# EAGLE board KissCart64-8K-MCU-DirtyPCBs (EAGLE 6.6.0)
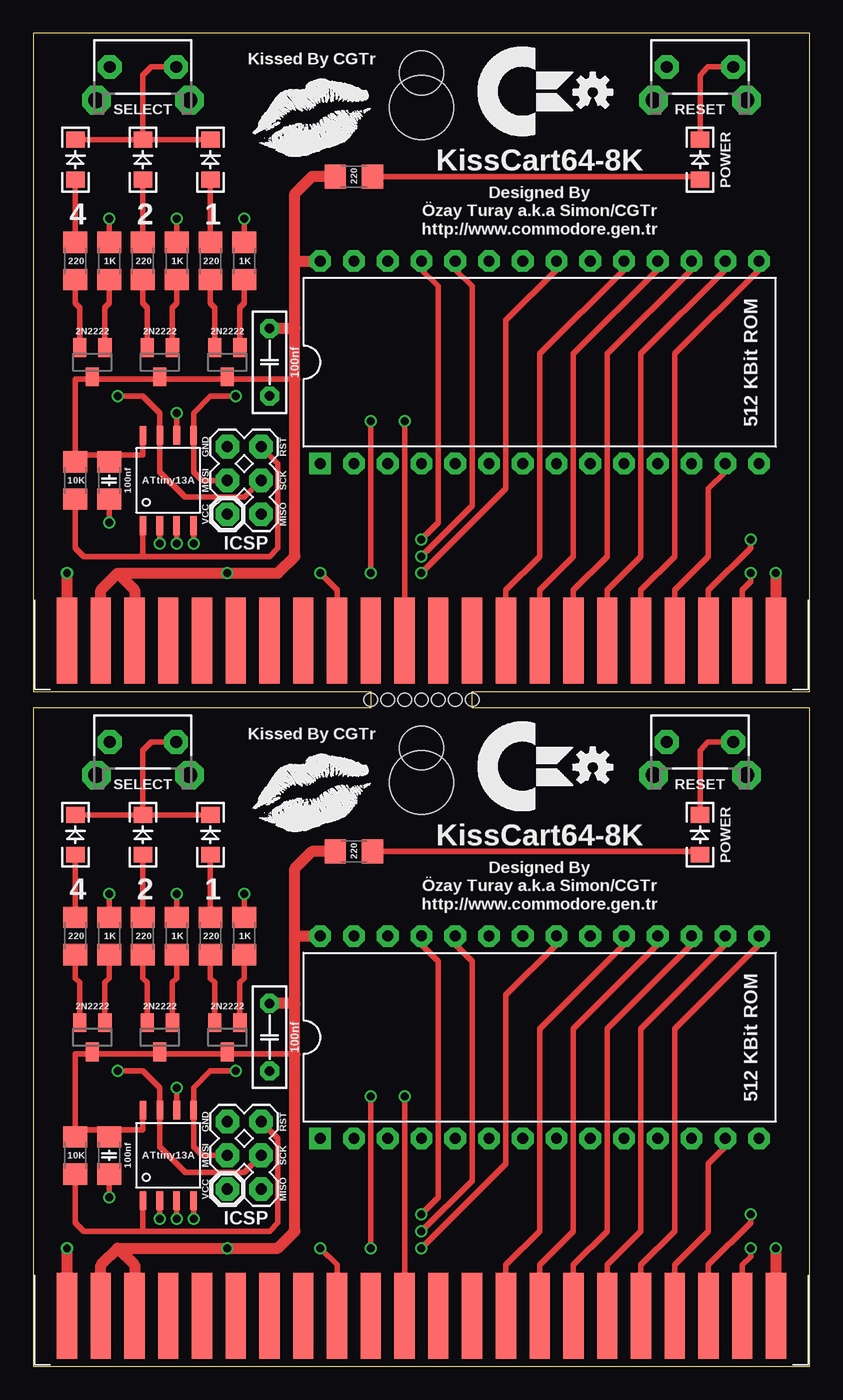
[diagram p0: board, top side]
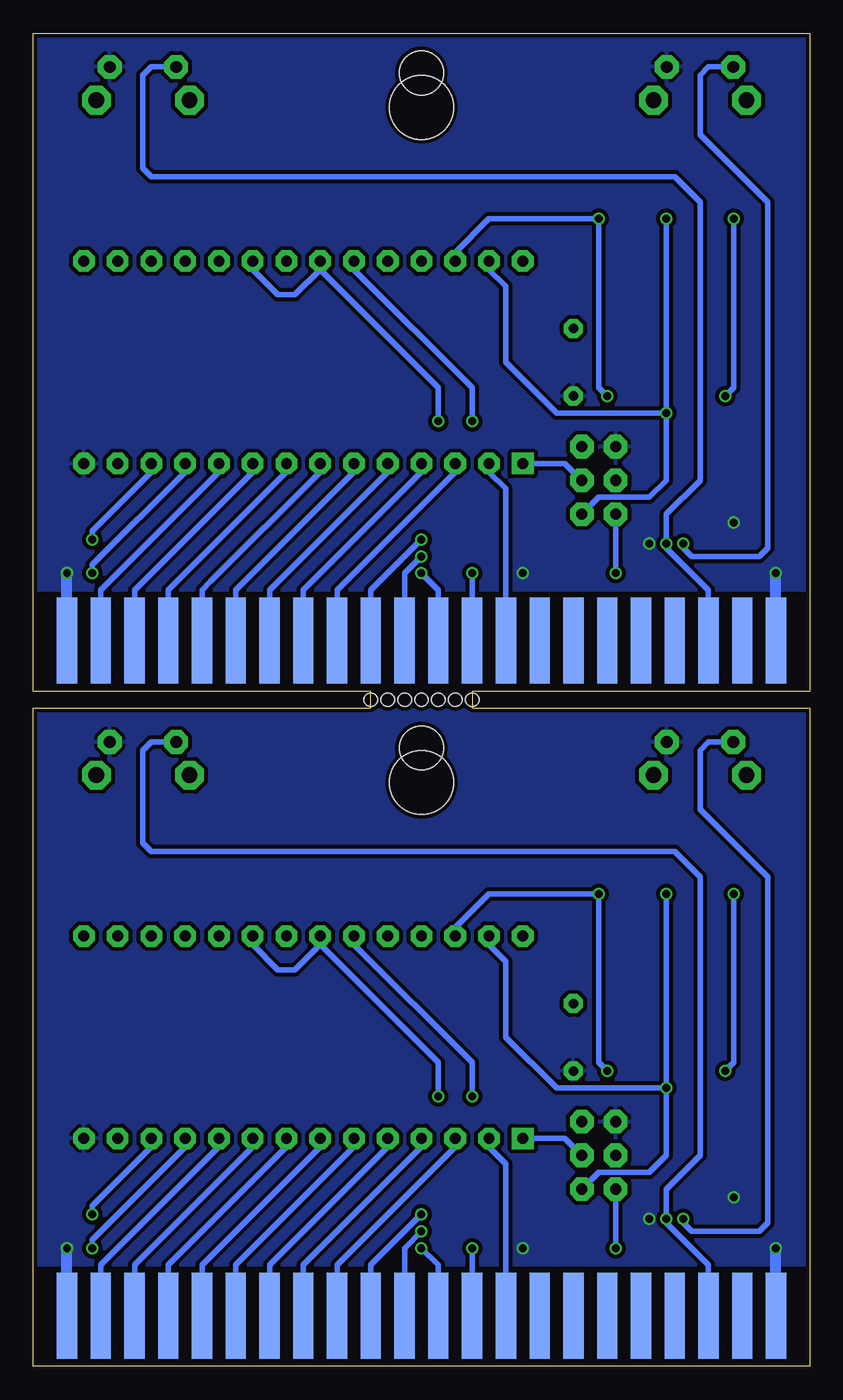
[diagram p1: board, bottom side, seen from below]

Size 58.42 x 100.33 mm. Coordinates in mm from the lower left corner, seen from the top.
Outline: 0,0 58.42,0 58.42,49.53 33.02,49.53 33.02,50.8 58.42,50.8 58.42,100.33 0,100.33 0,50.8 25.4,50.8 25.4,49.53 0,49.53 0,0
Copper layers (1*16): Top 0.035mm / dielectric 1.5mm / Bottom 0.035mm
Design rules "DirtyPCBs": minimum track width 5mil, minimum drill 12mil, track to track 5mil, track to pad 5mil, pad to pad 5mil, via to via 5mil, smd to smd 0mil, copper to edge 10mil, drill to drill 10mil, minimum pad ring 10mil, minimum via ring 6mil, stop-mask expansion 2mil, vias tented up to drill 25mil, thermal gap 10mil
Holes 4.8 mm at 29.21,43.94 29.21,94.74
Holes 3.3 mm at 29.21,46.54 29.21,97.34
Holes 1.02 mm at 29.21,50.16 30.48,50.16 31.75,50.16 33.02,50.16 27.94,50.16 26.67,50.16 25.4,50.16

## Footprints (pad centres in the part's own frame; a part is rotated, then mirrored left to right if it is on the bottom)
CAPACITOR_CERAMIC_0.2 = drill 0.711 pad 1.422 octagon: 1 -2.54,0; 2 2.54,0
CAPACITOR_CERAMIC_1206 = smd 1.6 x 1.8: 1 -1.4,0; 2 1.4,0
C64_CARTRIDGE = smd 1.524 x 6.477: 1 -26.67,-0.635; 2 -24.13,-0.635; 3 -21.59,-0.635; 4 -19.05,-0.635; 5 -16.51,-0.635; 6 -13.97,-0.635; 7 -11.43,-0.635; 8 -8.89,-0.635; 9 -6.35,-0.635; 10 -3.81,-0.635; 11 -1.27,-0.635; 12 1.27,-0.635; 13 3.81,-0.635; 14 6.35,-0.635; 15 8.89,-0.635; 16 11.43,-0.635; 17 13.97,-0.635; 18 16.51,-0.635; 19 19.05,-0.635; 20 21.59,-0.635; 21 24.13,-0.635; 22 26.67,-0.635 | smd 1.524 x 6.477 bottom: A -26.67,-0.635; B -24.13,-0.635; C -21.59,-0.635; D -19.05,-0.635; E -16.51,-0.635; F -13.97,-0.635; H -11.43,-0.635; J -8.89,-0.635; K -6.35,-0.635; L -3.81,-0.635; M -1.27,-0.635; N 1.27,-0.635; P 3.81,-0.635; R 6.35,-0.635; S 8.89,-0.635; T 11.43,-0.635; U 13.97,-0.635; V 16.51,-0.635; W 19.05,-0.635; X 21.59,-0.635; Y 24.13,-0.635; Z 26.67,-0.635
DIP28W = drill 0.813 pad 1.626 square: 1 -16.51,-7.62 | drill 0.813 pad 1.626 octagon: 2 -13.97,-7.62; 3 -11.43,-7.62; 4 -8.89,-7.62; 5 -6.35,-7.62; 6 -3.81,-7.62; 7 -1.27,-7.62; 8 1.27,-7.62; 9 3.81,-7.62; 10 6.35,-7.62; 11 8.89,-7.62; 12 11.43,-7.62; 13 13.97,-7.62; 14 16.51,-7.62; 15 16.51,7.62; 16 13.97,7.62; 17 11.43,7.62; 18 8.89,7.62; 19 6.35,7.62; 20 3.81,7.62; 21 1.27,7.62; 22 -1.27,7.62; 23 -3.81,7.62; 24 -6.35,7.62; 25 -8.89,7.62; 26 -11.43,7.62; 27 -13.97,7.62; 28 -16.51,7.62
SOP08 = smd 0.5 x 1.4: 1 -1.905,-3.404; 2 -0.645,-3.404; 3 0.625,-3.404; 4 1.895,-3.404; 5 1.905,3.404; 6 0.635,3.404; 7 -0.635,3.404; 8 -1.905,3.404
HDR_2X03 = drill 0.838 pad 1.778 octagon: 1 0,0; 2 0,-2.54; 3 2.54,0; 4 2.54,-2.54; 5 5.08,0; 6 5.08,-2.54
LED_1206 = smd 1.2 x 1.4: A -1.5,0; C 1.5,0
SOT-23 = smd 1 x 1.4: 1 -0.95,-1.1; 2 0.95,-1.1; 3 0,1.1
RESISTOR_SMT_1206 = smd 1.6 x 1.8: 1 -1.4,0; 2 1.4,0
SWITCH_THT_SIDE = drill 0.889 pad 1.778 octagon: 1 -2.5,0; 2 2.5,0 | drill 1.194 pad 2.159 octagon: ANCHOR1 -3.5,2.5; ANCHOR2 3.5,2.5

## Placement (x,y rotation side)
C1  100nf  [CAPACITOR_CERAMIC_0.2]  17.78,24.77 90 top
C2  100nf  [CAPACITOR_CERAMIC_1206]  5.71,15.88 90 top
C3  100nf  [CAPACITOR_CERAMIC_0.2]  17.78,75.56 90 top
C4  100nf  [CAPACITOR_CERAMIC_1206]  5.71,66.67 90 top
CONN1  C64 EXPANSION  [C64_CARTRIDGE]  29.21,4.45 0 top
CONN2  C64 EXPANSION  [C64_CARTRIDGE]  29.21,55.24 0 top
IC1  512 KBit ROM  [DIP28W]  38.1,24.77 0 top
IC2  ATtiny13A  [SOP08]  10.16,15.88 0 top
IC3  512 KBit ROM  [DIP28W]  38.1,75.56 0 top
IC4  ATtiny13A  [SOP08]  10.16,66.67 0 top
JP1  ICSP  [HDR_2X03]  14.61,13.34 90 top
JP2  ICSP  [HDR_2X03]  14.61,64.14 90 top
LED0  POWER  [LED_1206]  50.16,40.01 90 top
LED1  1  [LED_1206]  13.34,40.01 90 top
LED2  2  [LED_1206]  8.26,40.01 90 top
LED3  POWER  [LED_1206]  50.16,90.81 90 top
LED4  4  [LED_1206]  3.17,40.01 90 top
LED5  1  [LED_1206]  13.34,90.81 90 top
LED6  2  [LED_1206]  8.26,90.81 90 top
LED7  4  [LED_1206]  3.17,90.81 90 top
LOGO1  OSHW_LOGO_SMALL  [OSHW_LOGO_SMALL]  42.1,45.09 0 top
LOGO2  OSHW_LOGO_SMALL  [OSHW_LOGO_SMALL]  42.1,95.89 0 top
Q1  2N2222  [SOT-23]  14.61,24.77 180 top
Q2  2N2222  [SOT-23]  9.53,24.77 180 top
Q3  2N2222  [SOT-23]  4.45,24.77 180 top
Q4  2N2222  [SOT-23]  14.61,75.56 180 top
Q5  2N2222  [SOT-23]  9.53,75.56 180 top
Q6  2N2222  [SOT-23]  4.45,75.56 180 top
R0  220  [RESISTOR_SMT_1206]  24.13,38.73 0 top
R1  220  [RESISTOR_SMT_1206]  13.34,32.38 90 top
R2  220  [RESISTOR_SMT_1206]  8.26,32.38 90 top
R3  10K  [RESISTOR_SMT_1206]  3.17,15.88 270 top
R4  220  [RESISTOR_SMT_1206]  3.17,32.38 90 top
R5  220  [RESISTOR_SMT_1206]  24.13,89.53 0 top
R6  220  [RESISTOR_SMT_1206]  13.34,83.19 90 top
R7  220  [RESISTOR_SMT_1206]  8.26,83.19 90 top
R8  220  [RESISTOR_SMT_1206]  3.17,83.19 90 top
R9  10K  [RESISTOR_SMT_1206]  3.17,66.67 270 top
R10  1K  [RESISTOR_SMT_1206]  15.88,83.19 270 top
R11  1K  [RESISTOR_SMT_1206]  10.79,83.19 270 top
R12  1K  [RESISTOR_SMT_1206]  5.71,83.19 270 top
R13  1K  [RESISTOR_SMT_1206]  15.88,32.38 270 top
R14  1K  [RESISTOR_SMT_1206]  10.79,32.38 270 top
R15  1K  [RESISTOR_SMT_1206]  5.71,32.38 270 top
SW1  RESET  [SWITCH_THT_SIDE]  50.16,46.99 180 top
SW2  SELECT  [SWITCH_THT_SIDE]  8.26,46.99 180 top
SW3  RESET  [SWITCH_THT_SIDE]  50.16,97.79 180 top
SW4  SELECT  [SWITCH_THT_SIDE]  8.26,97.79 180 top

## Library data of the parts
C1-C4 LED0 LED1-LED7 LOGO1 LOGO2 Q1-Q6 R0 R1-R15 SW1-SW4 = sj_standart
CONN1 CONN2 = sj_commodore
IC1 IC3 = sj_ic
IC2 IC4 = sj_mcu
JP1 JP2 = sj_connectors

## Nets
A0: CONN1.Y IC1.10
A1: CONN1.X IC1.9
A2: CONN1.W IC1.8
A3: CONN1.V IC1.7
A4: CONN1.U IC1.6
A5: CONN1.T IC1.5
A6: CONN1.S IC1.4
A7: CONN1.R IC1.3
A8: CONN1.P IC1.25
A9: CONN1.N IC1.24
A10: CONN1.M IC1.21
A11: CONN1.L IC1.23
A12: CONN1.K IC1.2
A13: IC1.26 IC2.5 JP1.3 R13.1
A13_1: Q1.1 R13.2
A13_2: Q4.1 R10.2
A14: IC1.27 IC2.6 JP1.2 R14.1
A14_1: Q2.1 R14.2
A14_2: Q5.1 R11.2
A15: IC1.1 IC2.7 JP1.4 R15.1
A15_1: Q3.1 R15.2
A15_2: Q6.1 R12.2
A16: CONN2.Y IC3.10
A17: CONN2.X IC3.9
A18: CONN2.W IC3.8
A19: CONN2.V IC3.7
A20: CONN2.U IC3.6
A21: CONN2.T IC3.5
A22: CONN2.S IC3.4
A23: CONN2.R IC3.3
A24: CONN2.P IC3.25
A25: CONN2.N IC3.24
A26: CONN2.M IC3.21
A27: CONN2.L IC3.23
A28: CONN2.K IC3.2
A29: IC3.1 IC4.7 JP2.4 R12.1
A30: IC3.27 IC4.6 JP2.2 R11.1
A31: IC3.26 IC4.5 JP2.3 R10.1
D0: CONN1.21 IC1.11
D1: CONN1.20 IC1.12
D2: CONN1.19 IC1.13
D3: CONN1.18 IC1.15
D4: CONN1.17 IC1.16
D5: CONN1.16 IC1.17
D6: CONN1.15 IC1.18
D7: CONN1.14 IC1.19
D8: CONN2.21 IC3.11
D9: CONN2.20 IC3.12
D10: CONN2.19 IC3.13
D11: CONN2.18 IC3.15
D12: CONN2.17 IC3.16
D13: CONN2.16 IC3.17
D14: CONN2.15 IC3.18
D15: CONN2.14 IC3.19
GND: C1.1 C2.1 CONN1.1 CONN1.9 CONN1.22 CONN1.A CONN1.Z IC1.14 IC2.4 JP1.5 LED0.C LED1.C LED2.C LED4.C SW1.1 SW2.1
GND1: C3.1 C4.1 CONN2.1 CONN2.9 CONN2.22 CONN2.A CONN2.Z IC3.14 IC4.4 JP2.5 LED3.C LED5.C LED6.C LED7.C SW3.1 SW4.1
LED0_1: LED0.A R0.2
LED0_2: LED3.A R5.2
LED1_1: Q1.2 R1.1
LED1_2: LED1.A R1.2
LED1_3: Q4.2 R6.1
LED1_4: LED5.A R6.2
LED2_1: Q2.2 R2.1
LED2_2: LED2.A R2.2
LED2_3: Q5.2 R7.1
LED2_4: LED6.A R7.2
LED4_1: Q3.2 R4.1
LED4_2: LED4.A R4.2
LED4_3: Q6.2 R8.1
LED4_4: LED7.A R8.2
RESET: CONN1.C IC2.3 SW1.2
RESET1: CONN2.C IC4.3 SW3.2
ROML: CONN1.11 IC1.20 IC1.22
ROML1: CONN2.11 IC3.20 IC3.22
RST: IC2.1 JP1.6 R3.2
RST1: IC4.1 JP2.6 R9.2
SELECT: IC2.2 SW2.2
SELECT1: IC4.2 SW4.2
VCC: C1.2 C2.2 CONN1.2 CONN1.3 IC1.28 IC2.8 JP1.1 Q1.3 Q2.3 Q3.3 R0.1 R3.1
VCC1: C3.2 C4.2 CONN2.2 CONN2.3 IC3.28 IC4.8 JP2.1 Q4.3 Q5.3 Q6.3 R5.1 R9.1

## Tracks (layer width: path | path; a pad name or v marks a point on that pad's centre or on a via)
A0
  Bottom 0.406: IC1.10 44.45,16.51 53.34,7.62 CONN1.Y
A1
  Bottom 0.406: IC1.9 41.91,16.51 50.8,7.62 50.8,6.99 CONN1.X
A2
  Bottom 0.406: IC1.8 39.37,16.51 48.26,7.62 48.26,6.99 CONN1.W
A3
  Bottom 0.406: IC1.7 36.83,16.51 45.09,8.26 45.72,7.62 45.72,6.99 CONN1.V
A4
  Bottom 0.406: IC1.6 34.29,16.51 43.18,7.62 43.18,6.99 CONN1.U
A5
  Bottom 0.406: IC1.5 31.75,16.51 40.64,7.62 40.64,6.99 CONN1.T
A6
  Bottom 0.406: IC1.4 29.21,16.51 38.1,7.62 38.1,6.99 CONN1.S
A7
  Bottom 0.406: IC1.3 26.67,16.51 35.56,7.62 CONN1.R
A8  (via drill 0.6)
  Top 0.406: IC1.25 29.21,31.75 30.48,30.48 30.48,12.7 v29.21,11.43
  Bottom 0.406: v29.21,11.43 33.02,7.62 CONN1.P
A9  (via drill 0.6)
  Top 0.406: IC1.24 31.75,31.75 33.02,30.48 33.02,13.97 v29.21,10.16
  Bottom 0.406: v29.21,10.16 30.48,8.89 CONN1.N
A10  (via drill 0.6)
  Top 0.406: IC1.21 39.37,31.75 35.56,27.94 35.56,15.24 v29.21,8.89
  Bottom 0.406: v29.21,8.89 27.94,7.62 CONN1.M
A11  (via drill 0.6)
  Top 0.406: v25.4,20.32 v25.4,8.89
  Bottom 0.406: IC1.23 34.29,31.75 25.4,22.86 v25.4,20.32 | v25.4,8.89 CONN1.L
A12
  Bottom 0.406: IC1.2 24.13,16.51 22.86,15.24 CONN1.K
A13  (via drill 0.6)
  Top 0.406: v15.88,35.56 R13.1 | JP1.3 12.7,15.88 12.06,16.51 IC2.5 12.06,20.95 13.34,22.23 v15.24,22.23
  Bottom 0.406: IC1.26 26.67,33.02 24.13,35.56 v15.88,35.56 15.88,22.86 v15.24,22.23
A13_1
  Top 0.406: Q1.1 15.55,28.89 15.88,29.21 R13.2
A13_2
  Top 0.406: Q4.1 15.55,79.69 15.88,80.01 R10.2
A14  (via drill 0.6)
  Top 0.406: v10.79,35.56 R14.1 | v10.79,20.95 IC2.6
  Bottom 0.406: IC1.27 24.13,31.75 22.86,30.48 22.86,24.77 19.05,20.95 v10.79,20.95 | JP1.2 15.88,14.61 12.06,14.61 10.79,15.88 v10.79,20.95 | v10.79,20.95 v10.79,35.56
A14_1
  Top 0.406: Q2.1 10.47,28.89 10.79,29.21 R14.2
A14_2
  Top 0.406: Q5.1 10.47,79.69 10.79,80.01 R11.2
A15  (via drill 0.6)
  Top 0.406: v5.71,35.56 R15.1 | v6.35,22.23 8.26,22.23 9.53,20.95 IC2.7 9.53,16.51 11.43,14.61 15.88,14.61 JP1.4
  Bottom 0.406: IC1.1 18.41,17.14 JP1.4 | v6.35,22.23 5.71,22.86 v5.71,35.56
A15_1
  Top 0.406: R15.2 5.71,29.21 5.39,28.89 Q3.1
A15_2
  Top 0.406: R12.2 5.71,80.01 5.39,79.69 Q6.1
A16
  Bottom 0.406: IC3.10 44.45,67.31 53.34,58.42 CONN2.Y
A17
  Bottom 0.406: IC3.9 41.91,67.31 50.8,58.42 50.8,57.78 CONN2.X
A18
  Bottom 0.406: IC3.8 39.37,67.31 48.26,58.42 48.26,57.78 CONN2.W
A19
  Bottom 0.406: IC3.7 36.83,67.31 45.09,59.05 45.72,58.42 45.72,57.78 CONN2.V
A20
  Bottom 0.406: IC3.6 34.29,67.31 43.18,58.42 43.18,57.78 CONN2.U
A21
  Bottom 0.406: IC3.5 31.75,67.31 40.64,58.42 40.64,57.78 CONN2.T
A22
  Bottom 0.406: IC3.4 29.21,67.31 38.1,58.42 38.1,57.78 CONN2.S
A23
  Bottom 0.406: IC3.3 26.67,67.31 35.56,58.42 CONN2.R
A24  (via drill 0.6)
  Top 0.406: IC3.25 29.21,82.55 30.48,81.28 30.48,63.5 v29.21,62.23
  Bottom 0.406: v29.21,62.23 33.02,58.42 CONN2.P
A25  (via drill 0.6)
  Top 0.406: IC3.24 31.75,82.55 33.02,81.28 33.02,64.77 v29.21,60.96
  Bottom 0.406: v29.21,60.96 30.48,59.69 CONN2.N
A26  (via drill 0.6)
  Top 0.406: IC3.21 39.37,82.55 35.56,78.74 35.56,66.04 v29.21,59.69
  Bottom 0.406: v29.21,59.69 27.94,58.42 CONN2.M
A27  (via drill 0.6)
  Top 0.406: v25.4,71.12 v25.4,59.69
  Bottom 0.406: IC3.23 34.29,82.55 25.4,73.66 v25.4,71.12 | v25.4,59.69 CONN2.L
A28
  Bottom 0.406: IC3.2 24.13,67.31 22.86,66.04 CONN2.K
A29  (via drill 0.6)
  Top 0.406: v5.71,86.36 R12.1 | v6.35,73.03 8.26,73.03 9.53,71.75 IC4.7 9.53,67.31 11.43,65.41 15.88,65.41 JP2.4
  Bottom 0.406: IC3.1 18.41,67.94 JP2.4 | v6.35,73.03 5.71,73.66 v5.71,86.36
A30  (via drill 0.6)
  Top 0.406: v10.79,86.36 R11.1 | v10.79,71.75 IC4.6
  Bottom 0.406: IC3.27 24.13,82.55 22.86,81.28 22.86,75.56 19.05,71.75 v10.79,71.75 | JP2.2 15.88,65.41 12.06,65.41 10.79,66.67 v10.79,71.75 | v10.79,71.75 v10.79,86.36
A31  (via drill 0.6)
  Top 0.406: v15.88,86.36 R10.1 | JP2.3 12.7,66.67 12.06,67.31 IC4.5 12.06,71.75 13.34,73.03 v15.24,73.03
  Bottom 0.406: IC3.26 26.67,83.82 24.13,86.36 v15.88,86.36 15.88,73.66 v15.24,73.03
D0  (via drill 0.6)
  Top 0.406: v53.98,8.89 53.98,8.26 53.34,7.62 CONN1.21
  Bottom 0.406: IC1.11 46.99,16.51 53.98,9.53 v53.98,8.89
D1  (via drill 0.6)
  Top 0.406: v53.98,11.43 53.98,10.79 50.8,7.62 CONN1.20
  Bottom 0.406: IC1.12 49.53,16.51 53.98,12.06 v53.98,11.43
D2
  Top 0.406: IC1.13 52.07,16.51 50.8,15.24 50.8,10.16 48.26,7.62 CONN1.19
D3
  Top 0.406: IC1.15 54.61,31.75 48.26,25.4 48.26,10.16 45.72,7.62 CONN1.18
D4
  Top 0.406: IC1.16 52.07,31.75 45.72,25.4 45.72,10.16 43.18,7.62 CONN1.17
D5
  Top 0.406: IC1.17 49.53,31.75 43.18,25.4 43.18,10.16 40.64,7.62 CONN1.16
D6
  Top 0.406: IC1.18 46.99,31.75 40.64,25.4 40.64,10.16 38.1,7.62 CONN1.15
D7
  Top 0.406: IC1.19 44.45,31.75 38.1,25.4 38.1,10.16 35.56,7.62 CONN1.14
D8  (via drill 0.6)
  Top 0.406: v53.98,59.69 53.98,59.05 53.34,58.42 CONN2.21
  Bottom 0.406: IC3.11 46.99,67.31 53.98,60.33 v53.98,59.69
D9  (via drill 0.6)
  Top 0.406: v53.98,62.23 53.98,61.59 50.8,58.42 CONN2.20
  Bottom 0.406: IC3.12 49.53,67.31 53.98,62.87 v53.98,62.23
D10
  Top 0.406: IC3.13 52.07,67.31 50.8,66.04 50.8,60.96 48.26,58.42 CONN2.19
D11
  Top 0.406: IC3.15 54.61,82.55 48.26,76.2 48.26,60.96 45.72,58.42 CONN2.18
D12
  Top 0.406: IC3.16 52.07,82.55 45.72,76.2 45.72,60.96 43.18,58.42 CONN2.17
D13
  Top 0.406: IC3.17 49.53,82.55 43.18,76.2 43.18,60.96 40.64,58.42 CONN2.16
D14
  Top 0.406: IC3.18 46.99,82.55 40.64,76.2 40.64,60.96 38.1,58.42 CONN2.15
D15
  Top 0.406: IC3.19 44.45,82.55 38.1,76.2 38.1,60.96 35.56,58.42 CONN2.14
GND  (via drill 0.6)
  Top 0.406: CONN1.9 22.86,7.62 v21.59,8.89 | LED0.C 50.16,46.35 50.76,46.99 SW1.1 | LED4.C LED2.C | LED2.C 8.26,46.35 8.89,46.99 SW2.1 | LED1.C LED2.C | v5.71,12.7 C2.1 | v12.06,11.11 12.06,11.19 IC2.4 12.06,12.47 12.06,11.43
  Top 0.813: v2.54,8.89 CONN1.A | v55.88,8.89 CONN1.Z
  Bottom 0.813: CONN1.A v2.54,8.89 | CONN1.Z v55.88,8.89
  pour Bottom (isolate 0.305): 0,7.62 58.42,7.62 58.42,49.53 0,49.53
GND1  (via drill 0.6)
  Top 0.406: CONN2.9 22.86,58.42 v21.59,59.69 | LED3.C 50.16,97.16 50.76,97.79 SW3.1 | LED7.C LED6.C | LED6.C 8.26,97.16 8.89,97.79 SW4.1 | LED5.C LED6.C | v5.71,63.5 C4.1 | v12.06,61.91 12.06,61.99 IC4.4 12.06,63.27 12.06,62.23
  Top 0.813: v2.54,59.69 CONN2.A | v55.88,59.69 CONN2.Z
  Bottom 0.813: CONN2.A v2.54,59.69 | CONN2.Z v55.88,59.69
  pour Bottom (isolate 0.305): 0,58.42 58.42,58.42 58.42,100.33 0,100.33
LED0_1
  Top 0.406: R0.2 50.16,38.73 LED0.A
LED0_2
  Top 0.406: R5.2 50.16,89.53 LED3.A
LED1_1
  Top 0.406: Q1.2 13.65,28.89 13.34,29.21 R1.1
LED1_2
  Top 0.406: LED1.A R1.2
LED1_3
  Top 0.406: Q4.2 13.65,79.69 13.34,80.01 R6.1
LED1_4
  Top 0.406: LED5.A R6.2
LED2_1
  Top 0.406: Q2.2 8.57,28.89 8.26,29.21 R2.1
LED2_2
  Top 0.406: LED2.A R2.2
LED2_3
  Top 0.406: Q5.2 8.57,79.69 8.26,80.01 R7.1
LED2_4
  Top 0.406: LED6.A R7.2
LED4_1
  Top 0.406: Q3.2 3.5,28.89 3.17,29.21 R4.1
LED4_2
  Top 0.406: LED4.A R4.2
LED4_3
  Top 0.406: Q6.2 3.5,79.69 3.17,80.01 R8.1
LED4_4
  Top 0.406: LED7.A R8.2
RESET  (via drill 0.6)
  Top 0.406: v10.79,11.11 10.79,11.83 IC2.3
  Bottom 0.406: CONN1.C 7.62,7.62 10.79,10.79 v10.79,11.11 10.79,13.34 8.26,15.88 8.26,36.83 10.16,38.73 49.53,38.73 50.16,39.37 50.16,46.35 49.53,46.99 SW1.2 48.9,46.99
RESET1  (via drill 0.6)
  Top 0.406: v10.79,61.91 10.79,62.63 IC4.3
  Bottom 0.406: CONN2.C 7.62,58.42 10.79,61.59 v10.79,61.91 10.79,64.14 8.26,66.67 8.26,87.63 10.16,89.53 49.53,89.53 50.16,90.17 50.16,97.16 49.53,97.79 SW3.2 48.9,97.79
ROML  (via drill 0.6)
  Top 0.406: v27.94,20.32 CONN1.11
  Bottom 0.406: 36.83,31.75 38.73,29.84 40.01,29.84 41.91,31.75 IC1.20 | 36.83,31.75 27.94,22.86 v27.94,20.32 | IC1.22 36.83,31.75
ROML1  (via drill 0.6)
  Top 0.406: v27.94,71.12 CONN2.11
  Bottom 0.406: 36.83,82.55 38.73,80.64 40.01,80.64 41.91,82.55 IC3.20 | 36.83,82.55 27.94,73.66 v27.94,71.12 | IC3.22 36.83,82.55
RST
  Top 0.406: 8.26,10.16 3.81,10.16 3.17,10.79 R3.2 | JP1.6 18.41,17.14 18.41,10.79 17.78,10.16 8.26,10.16 | 8.26,10.16 IC2.1
RST1
  Top 0.406: 8.26,60.96 3.81,60.96 3.17,61.59 R9.2 | JP2.6 18.41,67.94 18.41,61.59 17.78,60.96 8.26,60.96 | 8.26,60.96 IC4.1
SELECT  (via drill 0.6)
  Top 0.406: IC2.2 9.53,12.06 v9.53,11.11
  Bottom 0.406: 5.71,46.99 SW2.2 7.62,46.99 8.26,46.35 8.26,41.91 3.17,36.83 3.17,10.79 3.81,10.16 8.89,10.16 9.53,10.79 v9.53,11.11
SELECT1  (via drill 0.6)
  Top 0.406: IC4.2 9.53,62.87 v9.53,61.91
  Bottom 0.406: 5.71,97.79 SW4.2 7.62,97.79 8.26,97.16 8.26,92.71 3.17,87.63 3.17,61.59 3.81,60.96 8.89,60.96 9.53,61.59 v9.53,61.91
VCC  (via drill 0.6)
  Top 0.406: C1.2 | R3.1 3.17,17.78 | 3.17,17.78 5.71,17.78 | 5.71,17.78 C2.2 | 19.68,23.5 14.61,23.5 | Q1.3 14.61,23.5 | 14.61,23.5 9.53,23.5 | 4.45,23.5 9.53,23.5 | 9.53,23.5 Q2.3 | IC2.8 8.26,17.78 5.71,17.78 | 3.17,17.78 3.17,23.5 4.45,23.5 | 4.45,23.5 Q3.3
  Top 0.813: CONN1.3 7.62,7.62 6.35,8.89 | CONN1.2 5.08,7.62 6.35,8.89 | 19.68,27.3 19.68,23.5 19.68,10.16 18.41,8.89 v14.61,8.89 6.35,8.89 | 19.68,27.3 C1.2 | 19.68,27.3 19.68,32.38 | 19.68,32.38 IC1.28 | R0.1 20.95,38.73 19.68,37.47 19.68,32.38
  Bottom 0.406: JP1.1 v14.61,8.89
VCC1  (via drill 0.6)
  Top 0.406: 17.77,78.1 C3.2 | R9.1 3.17,68.58 | 3.17,68.58 5.71,68.58 | 5.71,68.58 C4.2 | 19.68,74.3 14.61,74.3 | Q4.3 14.61,74.3 | 14.61,74.3 9.53,74.3 | 4.45,74.3 9.53,74.3 | 9.53,74.3 Q5.3 | IC4.8 8.26,68.58 5.71,68.58 | 3.17,68.58 3.17,74.3 4.45,74.3 | 4.45,74.3 Q6.3
  Top 0.813: CONN2.3 7.62,58.42 6.35,59.69 | CONN2.2 5.08,58.42 6.35,59.69 | 19.68,78.11 19.68,74.3 19.68,60.96 18.41,59.69 v14.61,59.69 6.35,59.69 | 19.68,78.11 C3.2 | 19.68,78.11 19.68,83.19 | 19.68,83.19 IC3.28 | R5.1 20.95,89.53 19.68,88.27 19.68,83.19
  Bottom 0.406: JP2.1 v14.61,59.69

## Text on the board
tPlace: Kissed By CGTr | KissCart64-8K | Designed By / Özay Turay a.k.a Simon/CGTr / http://www.commodore.gen.tr | GND | RST | MOSI | SCK | VCC | MISO | Kissed By CGTr | KissCart64-8K | Designed By / Özay Turay a.k.a Simon/CGTr / http://www.commodore.gen.tr | GND | RST | MOSI | SCK | VCC | MISO